# Altium PCB 4651_MEZ.PcbDoc
Units mm, origin at the board's own origin, x right, y up, seen from the top; angles counter-clockwise.
Board outline 90 x 85 mm, 2 copper layers (Top Layer, Bottom Layer); 6 components, 56 nets, 306 pads, 964 vias.
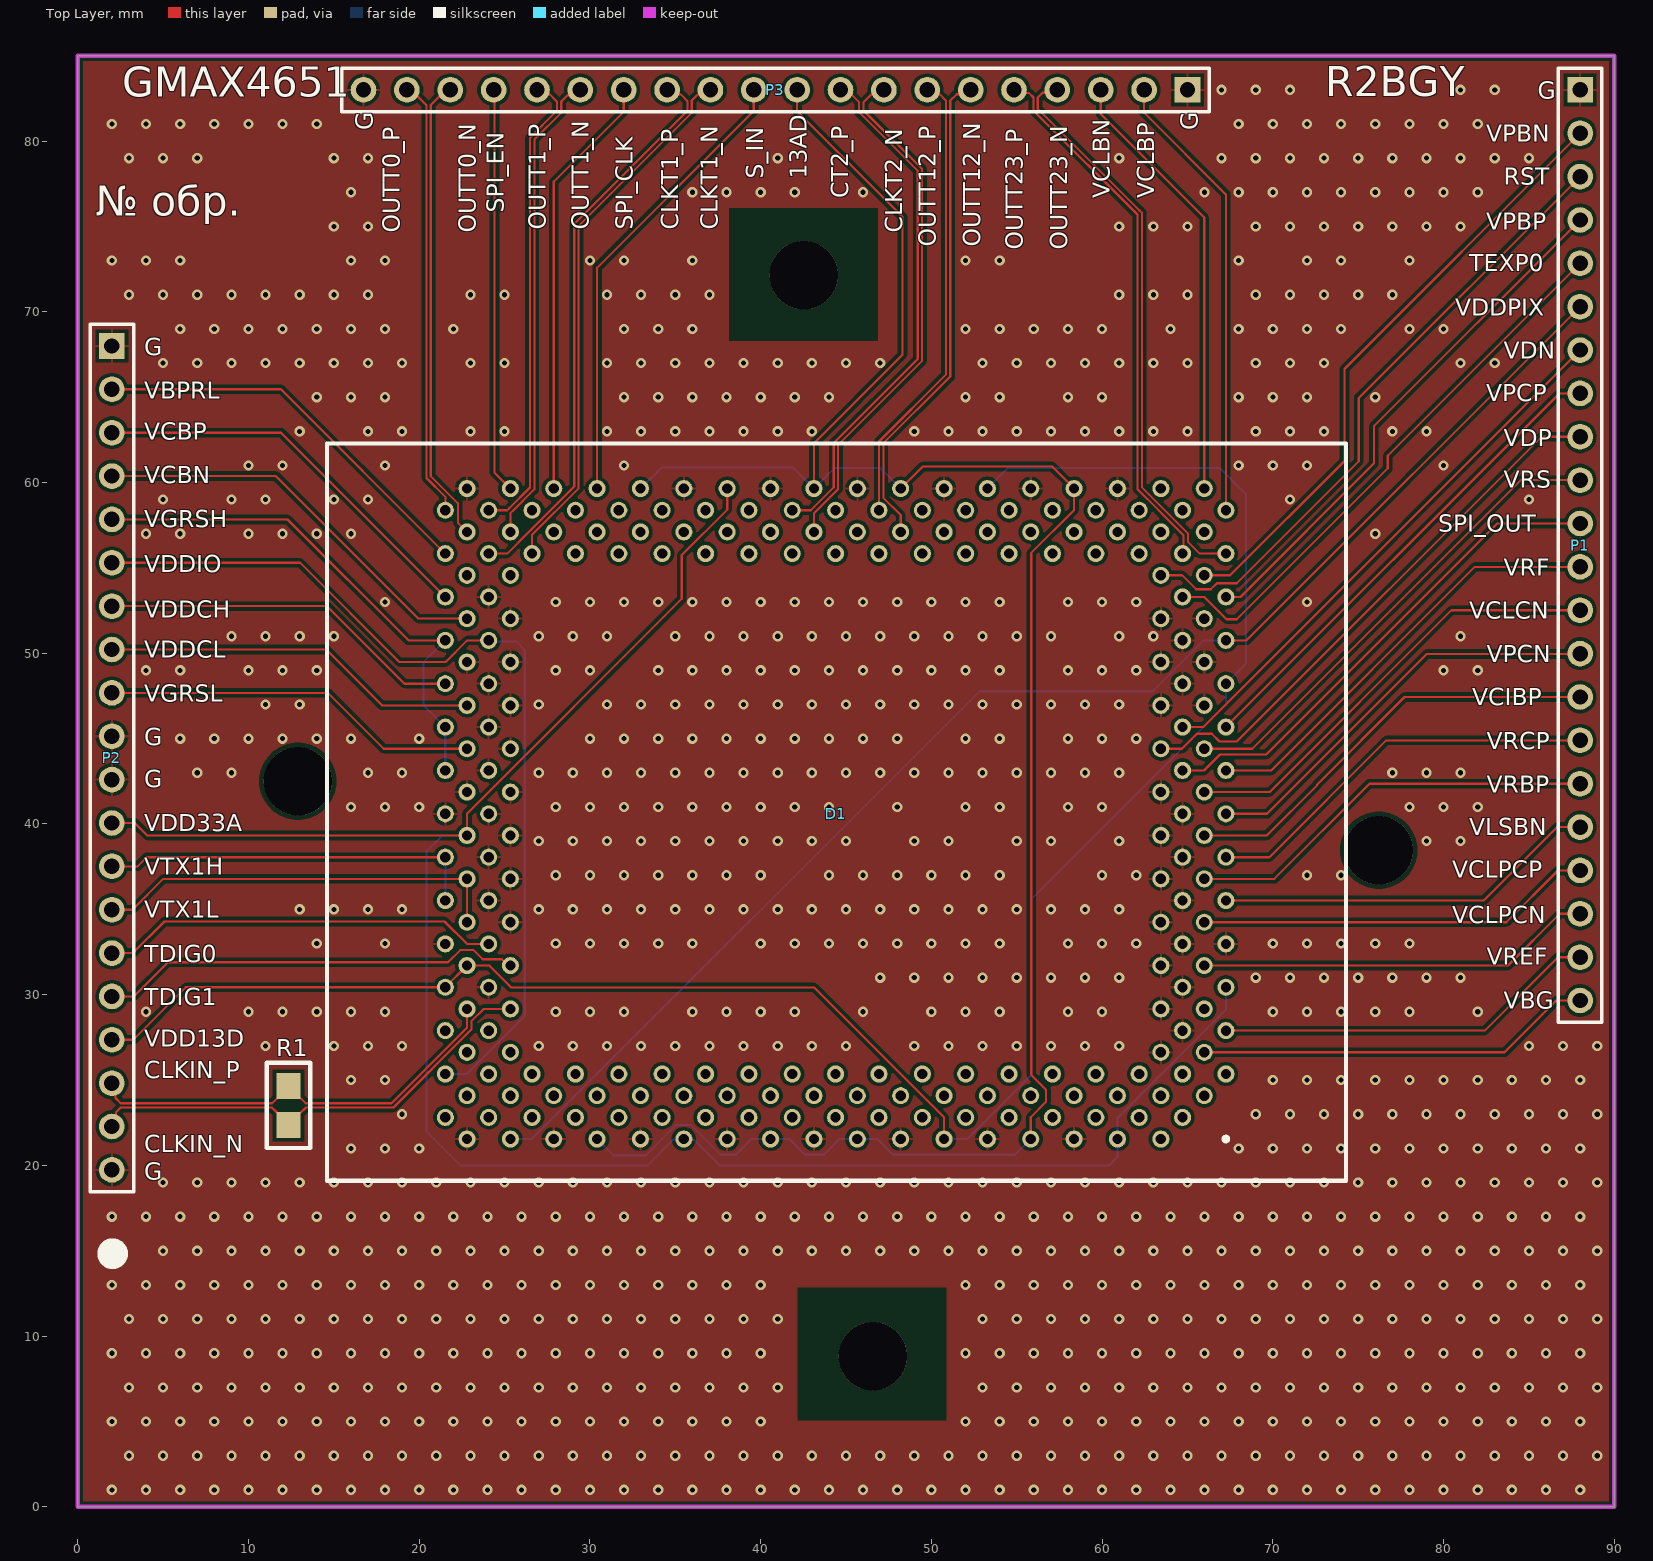
[diagram p0: Top Layer view]
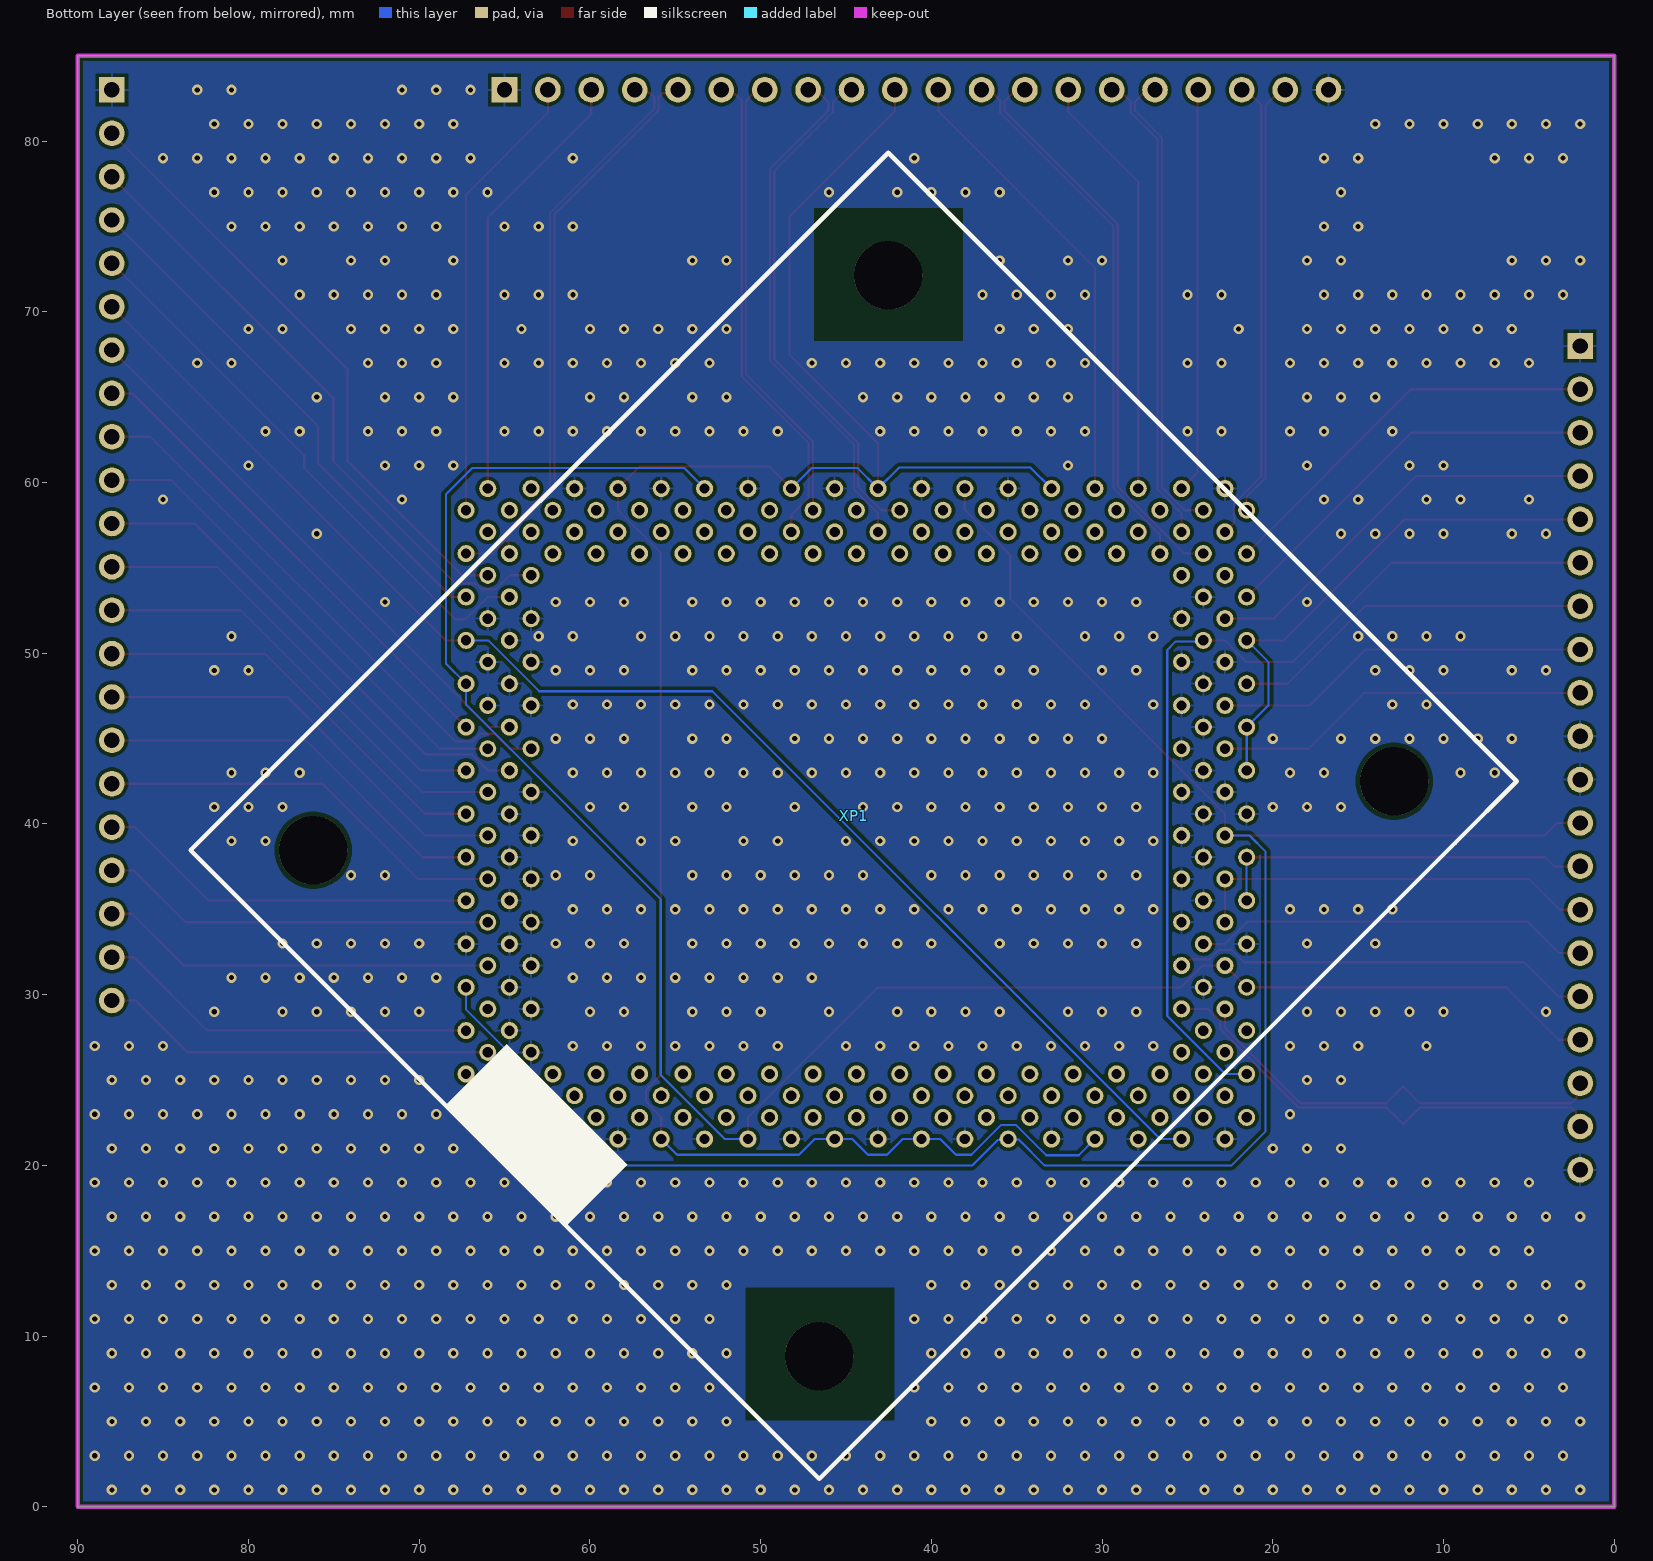
[diagram p1: Bottom Layer view, seen from below]

## Layer stack, top to bottom
Top Solder: solder mask 0.0102, Solder Resist, Dk 3.5
Top Layer: signal copper 0.0356
Dielectric 1: dielectric 0.32, FR-4, Dk 4.8
Bottom Layer: signal copper 0.0356
Bottom Solder: solder mask 0.0102, Solder Resist, Dk 3.5

## Board outline
0,0 0,85 90,85 90,0

## Design rules (kind name [scope] priority, off if disabled: settings)
BoardOutlineClearance [OnLayer('Multi-Layer')] p1: gap=0.254 ignorepadtopadclearanceinfootprint=FALSE except(0: Arc-SplitContinuation Track-SplitContinuation SMDPad-SplitContinuation THPad-SplitContinuation Via-SplitContinuation Fill-SplitContinuation Poly-SplitContinuation Region-SplitContinuation Text-SplitContinuation; 0.4: Arc-OutlineEdge Track-OutlineEdge SMDPad-OutlineEdge THPad-OutlineEdge Via-OutlineEdge Fill-OutlineEdge Poly-OutlineEdge Region-OutlineEdge Text-OutlineEdge)
Clearance [All] p1: gap=0.125 ignorepadtopadclearanceinfootprint=FALSE except(0.2: Arc-Fill Arc-Poly Track-Fill Track-Poly SMDPad-Fill SMDPad-Poly THPad-Fill THPad-Poly Via-Fill Via-Poly Fill-Fill Fill-Poly Poly-Poly Poly-Region Poly-Text; 0.25: Arc-Hole Track-Hole SMDPad-Hole THPad-Hole Via-Hole Fill-Hole Poly-Hole Region-Hole Text-Hole) // Standart
DiffPairsRouting [All] p1: maxlimit=0.254 minlimit=0.127 mostfreqgap=0.13 toplayer_minwidth=0.127 toplayer_maxwidth=0.381 toplayer_prefwidth=0.37 bottomlayer_minwidth=0.127 bottomlayer_maxwidth=0.381 bottomlayer_prefwidth=0.37 maxuncoupledlength=12.7
HoleSize [All] p1: absolutevalues=TRUE maxlimit=5 minlimit=0.3 maxpercent=80.000 minpercent=20.000
MinimumSolderMaskSliver [All] p1: minsoldermaskwidth=0.1
PlaneClearance "PlaneClearance-1 1/2 Oz" [All] p1: clearance=0.2 // Standart
PlaneConnect "TermalConnect-1 1/2 Oz" [All] p1: planeconnectstyle=Relief reliefexpansion=0.2 reliefentries=4 reliefconductorwidth=0.2 reliefairgap=0.2 // Standart
PolygonConnect "PolygonConnect-1 1/2 Oz" [All] p1: thpad.connectstyle=Relief thpad.reliefconductorwidth=0.15 thpad.reliefentries=4 thpad.polygonreliefangle="90 Angle" thpad.airgapwidth=0.2 smdpad.connectstyle=Relief smdpad.reliefconductorwidth=0.2 smdpad.reliefentries=4 smdpad.polygonreliefangle="90 Angle" smdpad.airgapwidth=0.2 via.connectstyle=Direct via.reliefconductorwidth=0.254 via.reliefentries=4 via.polygonreliefangle="90 Angle" via.airgapwidth=0.254 // Standart
RoutingVias [All] p1: holewidth=0.3 width=1.27 viastyle="Through Hole" minholewidth=0.3 minwidth=0.6 maxholewidth=0.711 maxwidth=1.27
SilkToSilkClearance [All] p1: silktosilkclearance=0
SilkToSolderMaskClearance [IsPad] p1: minsilkscreentomaskgap=0 clearancetoexposedcopper=TRUE
SolderMaskExpansion [All] p1: expansion=0.102 istentingtop=FALSE
UnRoutedNet [All] p1: checkbadconnections=TRUE
Width [All] p1: maxlimit=2.5 minlimit=0.125 preferedwidth=0.37
22 further rules are at their usual default settings.

## Classes and differential pairs
differential pair OUTT23: +OUTT23_P -OUTT23_N
differential pair OUTT12: +OUTT12_P -OUTT12_N
differential pair OUTT1: +OUTT1_P -OUTT1_N
differential pair OUTT0: +OUTT0_P -OUTT0_N
differential pair CLKT2: +CLKT2_P -CLKT2_N
differential pair CLKT1: +CLKT1_P -CLKT1_N
differential pair CLKIN: +CLKIN_P -CLKIN_N

## Components (designator, comment, footprint, x,y, rotation, side; value= is the part's Value field where it differs from the comment)
D1 "GMAX4651" GMAX4651 67.252,25.357 r0 top
P1 "Header 22" HDR1X22 88,83 r270 top
P2 "Header 20" HDR1X20 2,68 r270 top
P3 "Header 20" HDR1X20 65,83 r180 top
R1 "100" RES 11.1,21.031 r0 top
XP1 "Грелка" Грелка 12.896,42.502 r135 bottom

## Footprints (in the part's own frame and the unit in brackets; to place one, negate y for a bottom-side part, rotate by r counter-clockwise, add the part's x,y. Pads: shape width x height; smd on the part's side, far side on the other; paste and mask are expansions set on the pad)
GMAX4651 [mm]
  round 1 hole 0.6: A4(-3.81,-3.81) A6(-6.35,-3.81) A8(-8.89,-3.81) A10(-11.43,-3.81) A12(-13.97,-3.81) A14(-16.51,-3.81) A16(-19.05,-3.81) A18(-21.59,-3.81) A20(-24.13,-3.81) A22(-26.67,-3.81) A24(-29.21,-3.81) A26(-31.75,-3.81) A28(-34.29,-3.81) A30(-36.83,-3.81) A32(-39.37,-3.81) A34(-41.91,-3.81) A36(-44.45,-3.81) AA1(0,25.4) AA3(-2.54,25.4) AA35(-43.18,25.4) AA37(-45.72,25.4) B3(-2.54,-2.54) B5(-5.08,-2.54) B7(-7.62,-2.54) B9(-10.16,-2.54) B11(-12.7,-2.54) B13(-15.24,-2.54) B15(-17.78,-2.54) B17(-20.32,-2.54) B19(-22.86,-2.54) B21(-25.4,-2.54) B23(-27.94,-2.54) B25(-30.48,-2.54) B27(-33.02,-2.54) B29(-35.56,-2.54) B31(-38.1,-2.54) B33(-40.64,-2.54) B35(-43.18,-2.54) B37(-45.72,-2.54) BB2(-1.27,26.67) BB4(-3.81,26.67) BB34(-41.91,26.67) BB36(-44.45,26.67) C2(-1.27,-1.27) C4(-3.81,-1.27) C6(-6.35,-1.27) C8(-8.89,-1.27) C10(-11.43,-1.27) C12(-13.97,-1.27) C14(-16.51,-1.27) C16(-19.05,-1.27) C18(-21.59,-1.27) C20(-24.13,-1.27) C22(-26.67,-1.27) C24(-29.21,-1.27) C26(-31.75,-1.27) C28(-34.29,-1.27) C30(-36.83,-1.27) C32(-39.37,-1.27) C34(-41.91,-1.27) C36(-44.45,-1.27) CC1(0,27.94) CC3(-2.54,27.94) CC35(-43.18,27.94) CC37(-45.72,27.94) D1(0,0) D3(-2.54,0) D5(-5.08,0) D7(-7.62,0) D9(-10.16,0) D11(-12.7,0) D13(-15.24,0) D15(-17.78,0) D17(-20.32,0) D19(-22.86,0) D21(-25.4,0) D23(-27.94,0) D25(-30.48,0) D27(-33.02,0) D29(-35.56,0) D31(-38.1,0) D33(-40.64,0) D35(-43.18,0) D37(-45.72,0) DD2(-1.27,29.21) DD4(-3.81,29.21) DD34(-41.91,29.21) DD36(-44.45,29.21) E2(-1.27,1.27) E4(-3.81,1.27) E34(-41.91,1.27) E36(-44.45,1.27) EE1(0,30.48) EE3(-2.54,30.48) EE5(-5.08,30.48) EE7(-7.62,30.48) EE9(-10.16,30.48) EE11(-12.7,30.48) EE13(-15.24,30.48) EE15(-17.78,30.48) EE17(-20.32,30.48) EE19(-22.86,30.48) EE21(-25.4,30.48) EE23(-27.94,30.48) EE25(-30.48,30.48) EE27(-33.02,30.48) EE29(-35.56,30.48) EE31(-38.1,30.48) EE33(-40.64,30.48) EE35(-43.18,30.48) EE37(-45.72,30.48) F1(0,2.54) F3(-2.54,2.54) F35(-43.18,2.54) F37(-45.72,2.54) FF2(-1.27,31.75) FF4(-3.81,31.75) FF6(-6.35,31.75) FF8(-8.89,31.75) FF10(-11.43,31.75) FF12(-13.97,31.75) FF14(-16.51,31.75) FF16(-19.05,31.75) FF18(-21.59,31.75) FF20(-24.13,31.75) FF22(-26.67,31.75) FF24(-29.21,31.75) FF26(-31.75,31.75) FF28(-34.29,31.75) FF30(-36.83,31.75) FF32(-39.37,31.75) FF34(-41.91,31.75) FF36(-44.45,31.75) G2(-1.27,3.81) G4(-3.81,3.81) G34(-41.91,3.81) G36(-44.45,3.81) GG1(0,33.02) GG3(-2.54,33.02) GG5(-5.08,33.02) GG7(-7.62,33.02) GG9(-10.16,33.02) GG11(-12.7,33.02) GG13(-15.24,33.02) GG15(-17.78,33.02) GG17(-20.32,33.02) GG19(-22.86,33.02) GG21(-25.4,33.02) GG23(-27.94,33.02) GG25(-30.48,33.02) GG27(-33.02,33.02) GG29(-35.56,33.02) GG31(-38.1,33.02) GG33(-40.64,33.02) GG35(-43.18,33.02) GG37(-45.72,33.02) H1(0,5.08) H3(-2.54,5.08) H35(-43.18,5.08) H37(-45.72,5.08) HH2(-1.27,34.29) HH4(-3.81,34.29) HH6(-6.35,34.29) HH8(-8.89,34.29) HH10(-11.43,34.29) HH12(-13.97,34.29) HH14(-16.51,34.29) HH16(-19.05,34.29) HH18(-21.59,34.29) HH20(-24.13,34.29) HH22(-26.67,34.29) HH24(-29.21,34.29) HH26(-31.75,34.29) HH28(-34.29,34.29) HH30(-36.83,34.29) HH32(-39.37,34.29) HH34(-41.91,34.29) HH36(-44.45,34.29) J2(-1.27,6.35) J4(-3.81,6.35) J34(-41.91,6.35) J36(-44.45,6.35) K1(0,7.62) K3(-2.54,7.62) K35(-43.18,7.62) K37(-45.72,7.62) L2(-1.27,8.89) L4(-3.81,8.89) L34(-41.91,8.89) L36(-44.45,8.89) M1(0,10.16) M3(-2.54,10.16) M35(-43.18,10.16) M37(-45.72,10.16) N2(-1.27,11.43) N4(-3.81,11.43) N34(-41.91,11.43) N36(-44.45,11.43) P1(0,12.7) P3(-2.54,12.7) P35(-43.18,12.7) P37(-45.72,12.7) Q2(-1.27,13.97) Q4(-3.81,13.97) Q34(-41.91,13.97) Q36(-44.45,13.97) R1(0,15.24) R3(-2.54,15.24) R35(-43.18,15.24) R37(-45.72,15.24) S2(-1.27,16.51) S4(-3.81,16.51) S34(-41.91,16.51) S36(-44.45,16.51) T1(0,17.78) T3(-2.54,17.78) T35(-43.18,17.78) T37(-45.72,17.78) U2(-1.27,19.05) U4(-3.81,19.05) U34(-41.91,19.05) U36(-44.45,19.05) V1(0,20.32) V3(-2.54,20.32) V35(-43.18,20.32) V37(-45.72,20.32) W2(-1.27,21.59) W4(-3.81,21.59) W34(-41.91,21.59) W36(-44.45,21.59) X1(0,22.86) X3(-2.54,22.86) X35(-43.18,22.86) X37(-45.72,22.86) Y2(-1.27,24.13) Y4(-3.81,24.13) Y34(-41.91,24.13) Y36(-44.45,24.13)
  silkscreen extent -52.65,-6.25 7.04,36.93
HDR1X20 [mm] "Connector; Header; 20 Position"
  rect 1.5x1.5 hole 0.9: 1(0,0)
  round 1.5 hole 0.9: 2(2.54,0) 3(5.08,0) 4(7.62,0) 5(10.16,0) 6(12.7,0) 7(15.24,0) 8(17.78,0) 9(20.32,0) 10(22.86,0) 11(25.4,0) 12(27.94,0) 13(30.48,0) 14(33.02,0) 15(35.56,0) 16(38.1,0) 17(40.64,0) 18(43.18,0) 19(45.72,0) 20(48.26,0)
  silkscreen extent -1.27,-1.27 49.53,1.27
HDR1X22 [mm] "Connector; Header; 22 Position"
  rect 1.5x1.5 hole 0.9: 1(0,0)
  round 1.5 hole 0.9: 2(2.54,0) 3(5.08,0) 4(7.62,0) 5(10.16,0) 6(12.7,0) 7(15.24,0) 8(17.78,0) 9(20.32,0) 10(22.86,0) 11(25.4,0) 12(27.94,0) 13(30.48,0) 14(33.02,0) 15(35.56,0) 16(38.1,0) 17(40.64,0) 18(43.18,0) 19(45.72,0) 20(48.26,0) 21(50.8,0) 22(53.34,0)
  silkscreen extent -1.27,-1.27 54.61,1.27
RES [mil] "FROM_MAX"
  rect 55.98x60 smd: 1(49,52.71) 2(49,142.71)
  silkscreen extent -1,0 99,196, body extent 17,19 81,177, height 100
Грелка [mm]
  round 4 hole 4 unplated: 0(-47.625,41.91) 0(-47.625,0) 0(0,0) 0(0,41.91)
  silkscreen extent -52.71,-5.08 5.08,46.99

## Part data
P1: "Header, 22-Pin", LatestRevisionDate=17-Jul-2002, LatestRevisionNote="Re-released for DXP Platform.", Publisher="Altium Limited"
P2 P3: "Header, 20-Pin", LatestRevisionDate=17-Jul-2002, LatestRevisionNote="Re-released for DXP Platform.", Publisher="Altium Limited"
R1: library part RES

## Via types
v1: diameter 0.6, hole 0.3, Top Layer to Bottom Layer, 964 vias

## Nets (pads, with @x,y where several pads share a name; then routed paths per layer and width w, separated by ;. In a path a pad name is that pad's centre, name@x,y a point inside that pad or via, vN(x,y) a via of type N, cw(c..) or ccw(c..) an arc to the next point about the centre after c; other vN are vias at no path point)
CLKIN_N: D1.G34 P2.19 R1.1 | length 27.7
  Top Layer w0.127: P2.19 2.239,22.519 2.239,23.117 2.515,23.393 11.372,23.393 11.697,23.069 R1.1@12.344,22.421 ; R1.1 R1.1@12.344,22.421 ; D1.G34 23.782,29.167 23.059,28.444 23.059,27.961 18.491,23.393 13.368,23.393 13.043,23.069 12.992,23.069 R1.1@12.344,22.421
CLKIN_P: D1.G36 P2.18 R1.2 | length 25.5
  Top Layer w0.127: P2.18 2.208,24.612 2.208,23.954 2.515,23.647 11.387,23.647 12.344,24.605 R1.2 13.353,23.647 18.382,23.647 22.802,28.068 22.802,28.518 D1.G36
CLKT1_N: D1.EE33 P3.12 | length 31.8
  Top Layer w0.127: D1.EE33 26.612,56.936 29.34,59.664 29.34,75.035 35.966,81.661 35.966,82.372 36.331,82.737 36.797,82.737 P3.12
CLKT1_P: D1.EE35 P3.13 | length 33.4
  Top Layer w0.127: D1.EE35 25.154,55.837 26.416,57.099 26.416,57.103 29.083,59.77 29.083,75.141 35.709,81.767 35.709,82.35 35.322,82.737 34.783,82.737 P3.13
CLKT2_N: D1.FF20 P3.8 | length 30.7
  Top Layer w0.127: D1.FF20 43.122,58.202 44.538,59.618 44.538,62.209 49.457,67.127 49.457,78.364 46.028,81.793 46.028,82.271 46.494,82.737 46.957,82.737 P3.8
CLKT2_P: D1.GG21 P3.9 | length 30.4
  Top Layer w0.127: D1.GG21 42.934,58.377 44.281,59.724 44.281,62.315 49.2,67.234 49.2,78.257 45.771,81.686 45.771,82.271 45.041,83 P3.9
GND: D1.A8 D1.A12 D1.A16 D1.A20 D1.A24 D1.A28 D1.A32 D1.A36 D1.AA3 D1.BB2 D1.BB4 D1.BB34 D1.CC35 D1.E4 D1.F3 D1.G4 D1.H3 D1.H35 D1.HH6 D1.HH10 D1.HH14 D1.HH18 D1.HH22 D1.HH26 D1.HH36 D1.J4 D1.K1 D1.K3 D1.K37 D1.L4 D1.L34 D1.M3 D1.M35 D1.N4 D1.N34 D1.P3 D1.P35 D1.Q4 D1.Q34 D1.R3 D1.R35 D1.R37 D1.S4 D1.S34 D1.S36 D1.T35 D1.U34 D1.V35 D1.W2 D1.W4 D1.W34 D1.X3 D1.X35 D1.Y2 D1.Y4 D1.Y34 D1.Y36 P1.1 P2.1 P2.10 P2.11 P2.20 P3.1 P3.20
  other v1: 2,1 4,1 6,1 8,1 10,1 12,1 14,1 16,1 18,1 20,1 22,1 24,1 26,1 28,1 30,1 32,1 34,1 36,1 38,1 40,1 42,1 44,1 46,1 48,1 50,1 52,1 54,1 56,1 58,1 60,1 62,1 64,1 66,1 68,1 70,1 72,1 74,1 76,1 78,1 80,1 82,1 84,1 86,1 88,1 3,3 5,3 7,3 9,3 11,3 13,3 15,3 17,3 19,3 21,3 23,3 25,3 27,3 29,3 31,3 33,3 35,3 37,3 39,3 41,3 43,3 45,3 47,3 49,3 51,3 53,3 55,3 57,3 59,3 61,3 63,3 65,3 67,3 69,3 71,3 73,3 75,3 77,3 79,3 81,3 83,3 85,3 87,3 89,3 2,5 4,5 6,5 8,5 10,5 12,5 14,5 16,5 18,5 20,5 22,5 24,5 26,5 28,5 30,5 32,5 34,5 36,5 38,5 40,5 52,5 54,5 56,5 58,5 60,5 62,5 64,5 66,5 68,5 70,5 72,5 74,5 76,5 78,5 80,5 82,5 84,5 86,5 88,5 3,7 5,7 7,7 9,7 11,7 13,7 15,7 17,7 19,7 21,7 23,7 25,7 27,7 29,7 31,7 33,7 35,7 37,7 39,7 41,7 53,7 55,7 57,7 59,7 61,7 63,7 65,7 67,7 69,7 71,7 73,7 75,7 77,7 79,7 81,7 83,7 85,7 87,7 89,7 2,9 4,9 6,9 8,9 10,9 12,9 14,9 16,9 18,9 20,9 22,9 24,9 26,9 28,9 30,9 32,9 34,9 36,9 38,9 40,9 52,9 54,9 56,9 58,9 60,9 62,9 64,9 66,9 68,9 70,9 72,9 74,9 76,9 78,9 80,9 82,9 84,9 86,9 88,9 3,11 5,11 7,11 9,11 11,11 13,11 15,11 17,11 19,11 21,11 23,11 25,11 27,11 29,11 31,11 33,11 35,11 37,11 39,11 41,11 53,11 55,11 57,11 59,11 61,11 63,11 65,11 67,11 69,11 71,11 73,11 75,11 77,11 79,11 81,11 83,11 85,11 87,11 89,11 2,13 4,13 6,13 8,13 10,13 12,13 14,13 16,13 18,13 20,13 22,13 24,13 26,13 28,13 30,13 32,13 34,13 36,13 38,13 40,13 52,13 54,13 56,13 58,13 60,13 62,13 64,13 66,13 68,13 70,13 72,13 74,13 76,13 78,13 80,13 82,13 84,13 86,13 88,13 5,15 7,15 9,15 11,15 13,15 15,15 17,15 19,15 21,15 23,15 25,15 27,15 29,15 31,15 33,15 35,15 37,15 39,15 41,15 43,15 45,15 47,15 49,15 51,15 53,15 55,15 57,15 59,15 61,15 63,15 65,15 67,15 69,15 71,15 73,15 75,15 77,15 79,15 81,15 83,15 85,15 87,15 89,15 2,17 4,17 6,17 8,17 10,17 12,17 14,17 16,17 18,17 20,17 22,17 24,17 26,17 28,17 30,17 32,17 34,17 36,17 38,17 40,17 42,17 44,17 46,17 48,17 50,17 52,17 54,17 56,17 58,17 60,17 62,17 64,17 66,17 68,17 70,17 72,17 74,17 76,17 78,17 80,17 82,17 84,17 86,17 88,17 5,19 7,19 9,19 11,19 13,19 15,19 17,19 19,19 21,19 23,19 25,19 27,19 29,19 31,19 33,19 35,19 37,19 39,19 41,19 43,19 45,19 47,19 49,19 51,19 53,19 55,19 57,19 59,19 61,19 63,19 65,19 67,19 69,19 71,19 73,19 75,19 77,19 79,19 81,19 83,19 85,19 87,19 89,19 16,21 18,21 20,21 68,21 70,21 72,21 74,21 76,21 78,21 80,21 82,21 84,21 86,21 88,21 19,23 69,23 71,23 73,23 75,23 77,23 79,23 81,23 83,23 85,23 87,23 89,23 16,25 18,25 70,25 72,25 74,25 76,25 78,25 80,25 82,25 84,25 86,25 88,25 11,27 15,27 17,27 19,27 27,27 29,27 31,27 33,27 35,27 37,27 39,27 41,27 43,27 45,27 49,27 51,27 53,27 55,27 57,27 59,27 61,27 85,27 87,27 89,27 4,29 10,29 12,29 14,29 16,29 18,29 28,29 30,29 32,29 36,29 38,29 40,29 42,29 46,29 50,29 52,29 54,29 58,29 60,29 70,29 72,29 74,29 76,29 78,29 82,29 47,31 49,31 51,31 53,31 55,31 57,31 59,31 61,31 69,31 71,31 73,31 75,31 77,31 79,31 81,31 14,33 18,33 28,33 30,33 32,33 34,33 36,33 40,33 42,33 44,33 46,33 48,33 50,33 52,33 54,33 58,33 60,33 62,33 70,33 72,33 74,33 76,33 78,33 13,35 15,35 17,35 19,35 27,35 29,35 31,35 33,35 35,35 37,35 39,35 41,35 43,35 45,35 47,35 49,35 51,35 53,35 55,35 57,35 59,35 61,35 28,37 30,37 32,37 34,37 36,37 38,37 40,37 44,37 46,37 48,37 50,37 52,37 54,37 60,37 62,37 72,37 74,37 27,39 29,39 31,39 33,39 35,39 37,39 39,39 41,39 43,39 45,39 49,39 51,39 55,39 57,39 61,39 79,39 81,39 16,41 18,41 20,41 28,41 30,41 32,41 34,41 36,41 38,41 40,41 42,41 44,41 48,41 52,41 54,41 58,41 60,41 78,41 80,41 82,41 7,43 9,43 17,43 19,43 27,43 29,43 31,43 33,43 35,43 37,43 39,43 41,43 43,43 45,43 47,43 49,43 51,43 53,43 55,43 57,43 59,43 61,43 77,43 79,43 81,43 6,45 8,45 10,45 12,45 14,45 16,45 20,45 30,45 32,45 34,45 36,45 38,45 40,45 42,45 44,45 46,45 48,45 52,45 54,45 58,45 60,45 62,45 11,47 13,47 27,47 31,47 33,47 35,47 37,47 39,47 41,47 43,47 45,47 47,47 49,47 51,47 53,47 55,47 57,47 59,47 61,47 4,49 6,49 10,49 12,49 14,49 28,49 30,49 34,49 36,49 38,49 40,49 42,49 44,49 46,49 48,49 50,49 52,49 54,49 58,49 60,49 62,49 80,49 82,49 9,51 11,51 13,51 15,51 27,51 29,51 31,51 35,51 37,51 39,51 41,51 43,51 45,51 47,51 49,51 51,51 53,51 55,51 57,51 61,51 63,51 81,51 18,53 28,53 30,53 32,53 34,53 36,53 38,53 40,53 42,53 44,53 46,53 48,53 50,53 52,53 54,53 58,53 60,53 62,53 72,53 4,57 6,57 10,57 12,57 14,57 16,57 76,57 5,59 9,59 11,59 15,59 17,59 71,59 85,59 10,61 12,61 18,61 32,61 68,61 70,61 72,61 80,61 13,63 17,63 19,63 23,63 25,63 31,63 33,63 35,63 37,63 39,63 41,63 43,63 49,63 51,63 53,63 55,63 57,63 59,63 61,63 63,63 65,63 69,63 71,63 73,63 77,63 79,63 14,65 16,65 18,65 32,65 34,65 36,65 38,65 40,65 42,65 44,65 52,65 54,65 58,65 60,65 68,65 70,65 72,65 76,65 5,67 7,67 9,67 11,67 13,67 15,67 17,67 19,67 23,67 25,67 31,67 33,67 35,67 37,67 39,67 41,67 43,67 45,67 47,67 53,67 55,67 57,67 59,67 61,67 63,67 65,67 69,67 71,67 73,67 81,67 83,67 6,69 8,69 10,69 12,69 14,69 16,69 18,69 22,69 32,69 34,69 36,69 52,69 54,69 56,69 58,69 60,69 64,69 68,69 70,69 72,69 74,69 78,69 80,69 3,71 5,71 7,71 9,71 11,71 13,71 15,71 17,71 23,71 25,71 31,71 33,71 35,71 37,71 61,71 63,71 65,71 69,71 71,71 73,71 75,71 77,71 2,73 4,73 6,73 16,73 18,73 30,73 32,73 36,73 52,73 54,73 68,73 72,73 74,73 78,73 15,75 17,75 61,75 63,75 65,75 69,75 71,75 73,75 75,75 77,75 79,75 81,75 16,77 36,77 38,77 40,77 42,77 46,77 66,77 68,77 70,77 72,77 74,77 76,77 78,77 80,77 82,77 3,79 5,79 7,79 15,79 17,79 41,79 61,79 67,79 69,79 71,79 73,79 75,79 77,79 79,79 81,79 83,79 85,79 2,81 4,81 6,81 8,81 10,81 12,81 14,81 68,81 70,81 72,81 74,81 76,81 78,81 80,81 82,81 67,83 69,83 71,83 81,83 83,83
OUTT0_N: D1.FF36 P3.18 | length 27.4
  Top Layer w0.127: P3.18 21.56,83 20.679,82.118 20.679,60.373 22.264,58.787 22.264,57.645 D1.FF36
OUTT0_P: D1.GG37 P3.19 | length 25.7
  Top Layer w0.127: P3.19 19.54,83 20.422,82.118 20.422,60.401 20.425,60.398 20.425,60.268 21.532,59.16 D1.GG37
OUTT1_N: D1.FF34 P3.15 | length 27.8
  Top Layer w0.127: D1.FF34 25.342,58.195 25.536,58.39 26.749,59.602 26.749,80.089 28.324,81.664 28.324,82.321 28.683,82.681 28.749,82.681 29.068,83 P3.15
OUTT1_P: D1.GG35 P3.16 | length 27.7
  Top Layer w0.127: D1.GG35 25.16,58.377 25.279,58.496 26.492,59.709 26.492,80.196 28.067,81.77 28.067,82.321 27.651,82.737 27.163,82.737 P3.16
OUTT12_N: D1.FF16 P3.6 | length 28.8
  Top Layer w0.127: D1.FF16 48.202,58.097 47.189,59.11 47.189,62.294 51.108,66.213 51.108,82.375 51.478,82.746 52.046,82.746 P3.6
OUTT12_P: D1.GG17 P3.7 | length 27
  Top Layer w0.127: D1.GG17 46.932,59.036 46.932,62.401 50.851,66.319 50.851,82.372 50.486,82.737 50.023,82.737 P3.7
OUTT23_N: D1.EE1 P3.4 | length 33.5
  Top Layer w0.127: P3.4 57.208,82.828 56.514,82.828 56.236,82.55 56.236,81.893 56.238,81.893 62.179,75.952 62.181,75.952 62.332,75.801 62.332,59.715 65.024,57.023 65.024,56.54 65.727,55.837 D1.EE1
OUTT23_P: D1.EE3 P3.5 | length 31.7
  Top Layer w0.127: P3.5 55.017,82.823 55.706,82.823 55.979,82.55 55.979,81.787 56.129,81.636 56.131,81.636 62.072,75.695 62.075,75.695 62.075,59.609 63.314,58.369 63.496,58.187 64.767,56.917 64.767,55.892 D1.EE3
SPI_CLK: D1.HH32 P3.14 | length 25.1
  Top Layer w0.127: D1.HH32 27.882,77.615 31.98,81.713 P3.14
SPI_EN: D1.HH34 P3.17 | length 23.7
  Top Layer w0.127: P3.17@24.409,83 24.409,60.58 D1.HH34
SPI_IN: D1.HH30 P3.11 | length 27.3
  Top Layer w0.127: D1.HH30 30.422,72.586 39.6,81.764 P3.11@39.6,83.135
SPI_OUT: D1.T3 P1.11 | length 29.3
  Top Layer w0.127: D1.T3 65.972,43.137 66.904,44.069 69.621,44.069 83.152,57.6 P1.11
SYS_RST_N: D1.DD4 P1.3 | length 37.1
  Top Layer w0.127: D1.DD4 64.686,54.567 65.507,53.746 66.37,53.746 66.726,54.102 67.894,54.102 75.032,61.239 75.032,64.952 P1.3
TDIG0: D1.K35 P2.15 | length 23.4
  Top Layer w0.127: P2.15 3.23,32.44 5.08,34.29 21.488,34.29 22.801,32.977 D1.K35
TDIG1: D1.J34 P2.16 | length 24.8
  Top Layer w0.127: P2.16 3.281,29.9 5.283,31.902 21.692,31.902 22.403,32.614 23.19,32.614 23.724,32.08 24.844,32.08 25.217,31.707 D1.J34
TEXP0: D1.CC3 P1.5 | length 32.9
  Top Layer w0.127: D1.CC3 65.981,53.297 67.285,51.994 67.894,51.994 76.733,60.833 76.733,61.573 P1.5
VBG: D1.E2 P1.22 | length 23.3
  Top Layer w0.127: D1.E2 83.574,26.627 86.607,29.66 P1.22
VBPRL: D1.EE37 P2.2 | length 23.5
  Top Layer w0.127: P2.2 11.909,65.46 D1.EE37
VCBN: D1.BB36 P2.4 | length 24.3
  Top Layer w0.127: P2.4 11.604,60.38 19.957,52.027 D1.BB36
VCBP: D1.CC37 P2.3 | length 23.5
  Top Layer w0.127: P2.3 11.909,62.92 D1.CC37
VCIBP: D1.Q2 P1.15 | length 25.4
  Top Layer w0.127: D1.Q2 69.647,39.327 72.593,42.273 72.593,42.316 77.717,47.44 P1.15
VCLBN: D1.HH2 P3.3 | length 25.9
  Top Layer w0.127: P3.3 59.92,81.583 65.982,75.521 D1.HH2
VCLBP: D1.GG1 P3.2 | length 26.9
  Top Layer w0.127: P3.2@62.46,83.243 62.46,81.66 67.252,76.868 D1.GG1
VCLCN: D1.S2 P1.13 | length 26.4
  Top Layer w0.127: D1.S2 69.807,41.867 80.46,52.52 P1.13
VCLPCN: D1.J2 P1.20 | length 23.3
  Top Layer w0.127: D1.J2 83.777,31.707 86.81,34.74 P1.20
VCLPCP: D1.L2 P1.19 | length 23.3
  Top Layer w0.127: D1.L2 83.675,34.247 86.708,37.28 P1.19
VDD13AD: D1.A10 D1.A18 D1.A22 D1.A30 D1.HH8 D1.HH16 D1.HH20 D1.HH28 P3.10 | length 125.6
  Top Layer w0.127: P3.10 42.139,81.737 48.311,75.565 48.311,67.488 43.122,62.299 D1.HH20 ; D1.HH16 49.49,60.935 57.074,60.935 D1.HH8 58.362,58.387 55.855,55.88 55.855,25.298 56.718,24.435 56.718,23.724 55.822,22.827 D1.A10
  Bottom Layer w0.127: D1.A30 31.37,20.599 33.274,20.599 35.052,22.377 35.916,22.377 37.668,20.625 38.557,20.625 39.479,21.547 D1.A22 41.674,21.547 42.596,20.625 43.713,20.625 44.636,21.547 D1.A18 46.83,21.547 47.752,20.625 54.9,20.625 D1.A10 ; D1.HH28 34.199,60.884 41.885,60.884 D1.HH20 44.333,60.858 46.991,60.858 D1.HH16
VDD13D: D1.A14 D1.H37 D1.HH12 D1.J36 D1.X1 P2.17 | length 117.7
  Top Layer w0.127: P2.17 3.255,27.36 6.332,30.437 D1.H37 D1.J36 24.097,31.707 25.375,30.429 43.129,30.429 50.742,22.816 D1.A14
  Bottom Layer w0.127: D1.A14 52.103,21.547 55.855,25.298 55.855,35.585 67.252,46.983 D1.X1 68.428,49.393 68.428,59.309 66.878,60.858 54.493,60.858 D1.HH12
VDD33A: D1.A6 D1.A26 D1.H1 D1.HH24 D1.Q36 P2.12 | length 122.3
  Top Layer w0.127: P2.12 3.349,40.06 4.082,39.327 D1.Q36 22.802,40.607 35.382,53.188 35.382,55.753 38.042,58.413 D1.HH24
  Bottom Layer w0.127: D1.Q36 21.369,39.327 20.422,38.379 20.422,21.996 22.428,19.99 33.35,19.99 34.886,21.525 35.48,21.525 D1.A26 35.56,21.489 36.118,21.489 37.617,19.99 60.376,19.99 60.902,20.516 D1.A6 60.902,22.777 67.252,29.127 D1.H1
VDDCH: D1.X37 P2.7 | length 21.4
  Top Layer w0.127: P2.7 14.601,52.76 19.144,48.217 D1.X37
VDDCL: D1.W36 P2.8 | length 22.2
  Top Layer w0.127: P2.8 14.55,50.22 17.823,46.947 D1.W36
VDDIO: D1.AA35 D1.D37 P2.6 | length 54.9
  Top Layer w0.127: P2.6 13.026,55.3 18.847,49.479 21.539,49.479 22.817,50.757 D1.AA35
  Bottom Layer w0.127: D1.D37 22.792,25.357 26.187,28.753 26.187,50.19 25.679,50.698 24.131,50.698 D1.AA35
VDDPIX: D1.A34 D1.AA1 P1.6 | length 82.9
  Top Layer w0.127: D1.AA1 68.457,50.757 P1.6
  Bottom Layer w0.127: D1.A34 26.602,21.547 52.832,47.777 62.967,47.777 65.946,50.757 D1.AA1
VDN: D1.V3 P1.7 | length 32.4
  Top Layer w0.127: D1.V3 65.917,45.677 P1.7
VDP: D1.U4 P1.9 | length 32.5
  Top Layer w0.127: D1.U4 64.676,44.407 65.557,45.288 66.421,45.288 66.878,44.831 67.894,44.831 85.743,62.68 P1.9
VGRSH: D1.AA37 D1.T37 D1.V37 P2.5 | length 31.2
  Top Layer w0.127: P2.5 12.289,57.84 19.372,50.757 D1.AA37
  Bottom Layer w0.127: D1.T37 D1.V37 20.244,46.965 20.244,49.469 D1.AA37
VGRSL: D1.U36 P2.9 | length 22.2
  Top Layer w0.127: P2.9 14.652,47.68 17.925,44.407 D1.U36
VLSBN: D1.M1 P1.18 | length 22.5
  Top Layer w0.127: D1.M1 82.355,35.517 86.665,39.827 P1.18@88,39.827
VPBN: D1.DD2 P1.2 | length 35.9
  Top Layer w0.127: D1.DD2 67.496,54.567 74.193,61.265 74.193,66.653 P1.2
VPBP: D1.CC1 P1.4 | length 31.2
  Top Layer w0.127: D1.CC1 68.105,53.297 75.921,61.112 75.921,63.301 P1.4
VPCN: D1.R1 P1.14 | length 24.6
  Top Layer w0.127: D1.R1 69.655,40.597 79.019,49.962 P1.14@88,49.962
VPCP: D1.V1 P1.8 | length 28.8
  Top Layer w0.127: D1.V1 86.795,65.22 P1.8
VRBP: D1.N2 P1.17 | length 24.3
  Top Layer w0.127: D1.N2 70.086,36.787 75.659,42.36 P1.17
VRCP: D1.P1 P1.16 | length 23.6
  Top Layer w0.127: D1.P1 69.807,38.057 76.65,44.9 P1.16
VREF: D1.F1 P1.21 | length 22.5
  Top Layer w0.127: D1.F1 82.405,27.897 86.708,32.2 P1.21
VRF: D1.T1 P1.12 | length 25.7
  Top Layer w0.127: D1.T1 69.909,43.137 81.832,55.06 P1.12
VRS: D1.U2 P1.10 | length 28.5
  Top Layer w0.127: D1.U2 68.791,44.407 84.524,60.14 P1.10
VTX1H: D1.M37 D1.P37 P2.13 | length 22.3
  Top Layer w0.127: P2.13 3.509,37.52 4.046,38.057 D1.P37
  Bottom Layer w0.127: D1.M37 D1.P37
VTX1L: D1.L36 D1.N36 P2.14 | length 24.1
  Top Layer w0.127: P2.14 3.205,34.98 5.012,36.787 D1.N36 D1.L36
pads on no net: D1.A4 D1.B3 D1.B5 D1.B7 D1.B9 D1.B11 D1.B13 D1.B15 D1.B17 D1.B19 D1.B21 D1.B23 D1.B25 D1.B27 D1.B29 D1.B31 D1.B33 D1.B35 D1.B37 D1.C2 D1.C4 D1.C6 D1.C8 D1.C10 D1.C12 D1.C14 D1.C16 D1.C18 D1.C20 D1.C22 D1.C24 D1.C26 D1.C28 D1.C30 D1.C32 D1.C34 D1.C36 D1.D1 D1.D3 D1.D5 D1.D7 D1.D9 D1.D11 D1.D13 D1.D15 D1.D17 D1.D19 D1.D21 D1.D23 D1.D25 D1.D27 D1.D29 D1.D31 D1.D33 D1.D35 D1.DD34 D1.DD36 D1.E34 D1.E36 D1.EE5 D1.EE7 D1.EE9 D1.EE11 D1.EE13 D1.EE15 D1.EE17 D1.EE19 D1.EE21 D1.EE23 D1.EE25 D1.EE27 D1.EE29 D1.EE31 D1.F35 D1.F37 D1.FF2 D1.FF4 D1.FF6 D1.FF8 D1.FF10 D1.FF12 D1.FF14 D1.FF18 D1.FF22 D1.FF24 D1.FF26 D1.FF28 D1.FF30 D1.FF32 D1.G2 D1.GG3 D1.GG5 D1.GG7 D1.GG9 D1.GG11 D1.GG13 D1.GG15 D1.GG19 D1.GG23 D1.GG25 D1.GG27 D1.GG29 D1.GG31 D1.GG33 D1.HH4 XP1.0

## Polygon pours and split planes (outlines as drawn)
GND on Bottom Layer "Top Overlay-No Net" (solid, remove dead copper, pour order 0): 0,0 0,85 90,85 90,0
GND on Top Layer "Top Overlay-No Net" (solid, remove dead copper, pour order 1): 0,84.95 0,-0.038 90,-0.038 90,84.95

## Keep-outs
Keep-Out Layer:
  the board outline again, w0.254

## Other copper
Multi-Layer:
  pour cut-out: 42.164,12.867 42.164,5.08 50.876,5.08 50.876,12.841
  pour cut-out: 38.151,76.087 38.151,68.301 46.863,68.301 46.863,76.062

## Silkscreen, mask and mechanical layers (free items; w line width, h text height)
Top Overlay:
  circle w1: c2.044,14.832 r0.398
  text "G" at 85.514,82.482 h1
  text "R2BGY" at 73.083,82.03 h3
  text "G" at 17.289,80.637 h1 r90
  text "G" at 65.6,80.637 h1 r90
  text "VPBN" at 82.514,79.967 h1
  text "S_IN" at 40.168,77.804 h1 r90
  text "13AD" at 42.715,77.804 h1 r90
  text "RST" at 83.514,77.453 h1
  text "CT2_P" at 45.146,76.638 h1 r90
  text "VCLBN" at 60.444,76.638 h1 r90
  text "VCLBP" at 63.06,76.638 h1 r90
  text "SPI_EN" at 24.953,75.805 h1 r90
  text "№ обр." at 1.057,75.043 h3
  text "OUTT1_P" at 27.417,74.805 h1 r90
  text "OUTT1_N" at 29.931,74.805 h1 r90
  text "SPI_CLK" at 32.497,74.805 h1 r90
  text "CLKT1_P" at 35.164,74.805 h1 r90
  text "CLKT1_N" at 37.501,74.805 h1 r90
  text "VPBP" at 82.514,74.811 h1
  text "OUTT0_P" at 18.857,74.639 h1 r90
  text "OUTT0_N" at 23.302,74.639 h1 r90
  text "CLKT2_N" at 48.288,74.639 h1 r90
  text "OUTT12_P" at 50.251,73.806 h1 r90
  text "OUTT12_N" at 52.868,73.806 h1 r90
  text "OUTT23_P" at 55.357,73.639 h1 r90
  text "OUTT23_N" at 57.948,73.639 h1 r90
  text "TEXP0" at 81.515,72.373 h1
  text "VDDPIX" at 80.682,69.757 h1
  text "G" at 3.888,67.445 h1
  text "VDN" at 83.514,67.242 h1
  text "VBPRL" at 3.888,64.905 h1
  text "VPCP" at 82.514,64.753 h1
  text "VCBP" at 3.888,62.518 h1
  text "VDP" at 83.514,62.111 h1
  text "VCBN" at 3.888,59.952 h1
  text "VRS" at 83.514,59.698 h1
  text "VGRSH" at 3.888,57.387 h1
  text "SPI_OUT" at 79.682,57.114 h1
  text "VDDIO" at 3.888,54.745 h1
  text "VRF" at 83.514,54.542 h1
  text "VDDCH" at 3.888,52.078 h1
  text "VCLCN" at 81.515,52.027 h1
  text "VDDCL" at 3.888,49.741 h1
  text "VPCN" at 82.521,49.487 h1
  text "VGRSL" at 3.888,47.151 h1
  text "VCIBP" at 81.672,46.947 h1
  text "G" at 3.888,44.611 h1
  text "VRCP" at 82.521,44.382 h1
  text "G" at 3.888,42.147 h1
  text "VRBP" at 82.521,41.842 h1
  text "VDD33A" at 3.888,39.581 h1
  text "VLSBN" at 81.513,39.327 h1
  text "VTX1H" at 3.888,37.041 h1
  text "VCLPCP" at 80.515,36.838 h1
  text "VTX1L" at 3.888,34.501 h1
  text "VCLPCN" at 80.515,34.197 h1
  text "TDIG0" at 3.888,31.911 h1
  text "VREF" at 82.521,31.758 h1
  text "TDIG1" at 3.888,29.371 h1
  text "VBG" at 83.514,29.193 h1
  text "VDD13D" at 3.888,26.958 h1
  text "CLKIN_P" at 3.888,25.11 h1
  text "CLKIN_N" at 3.888,20.767 h1
  text "G" at 3.888,19.16 h1